# Altium PCB design1.PcbDoc
Units mm, origin at the board's own origin, x right, y up, seen from the top; angles counter-clockwise.
Board outline 144.12 x 156.82 mm, 2 copper layers (Top, Bottom); 84 components, 55 nets, 253 pads, 25 vias.
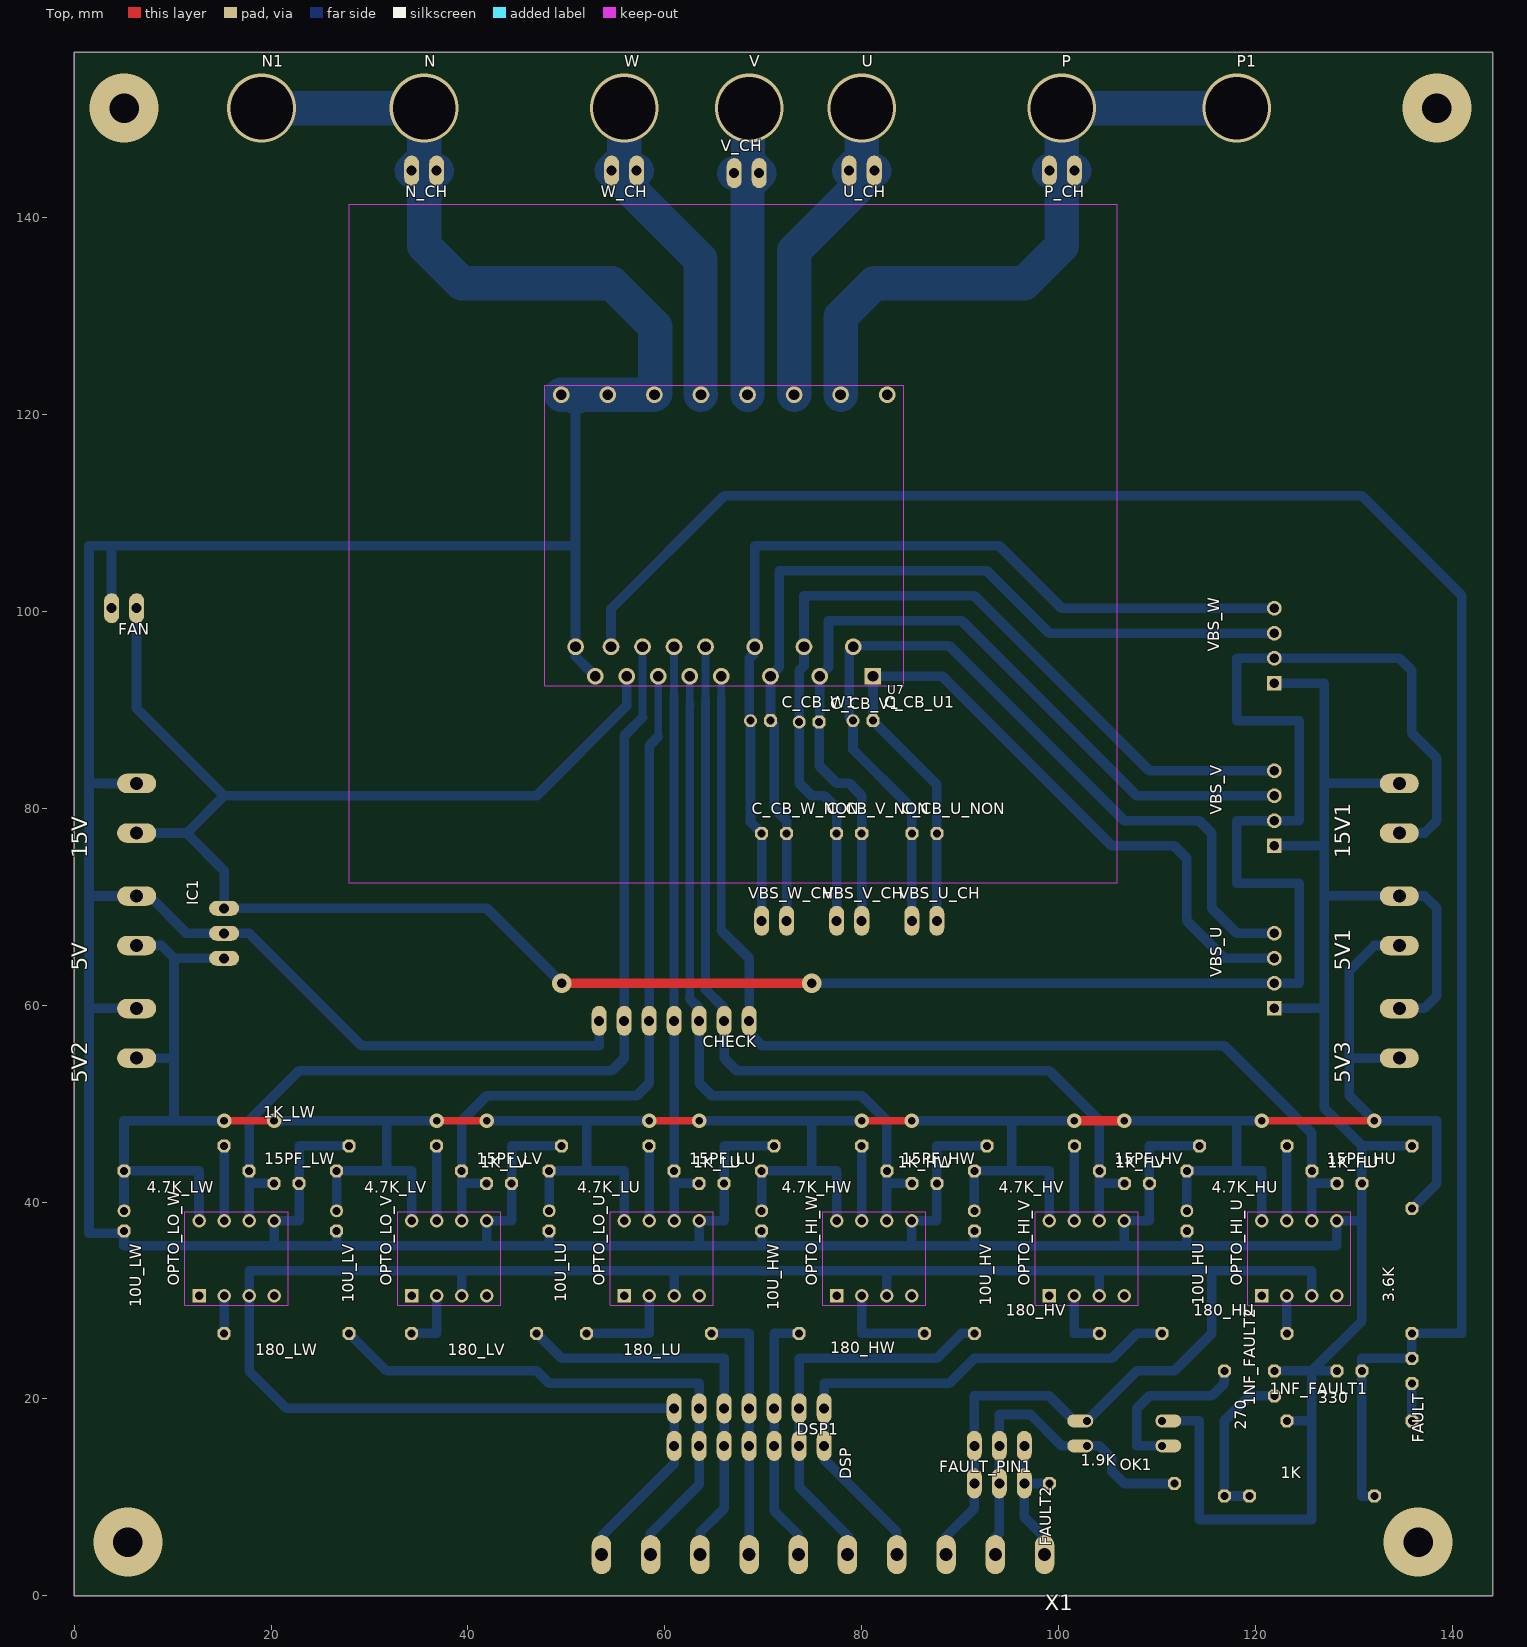
[diagram p0: Top view]
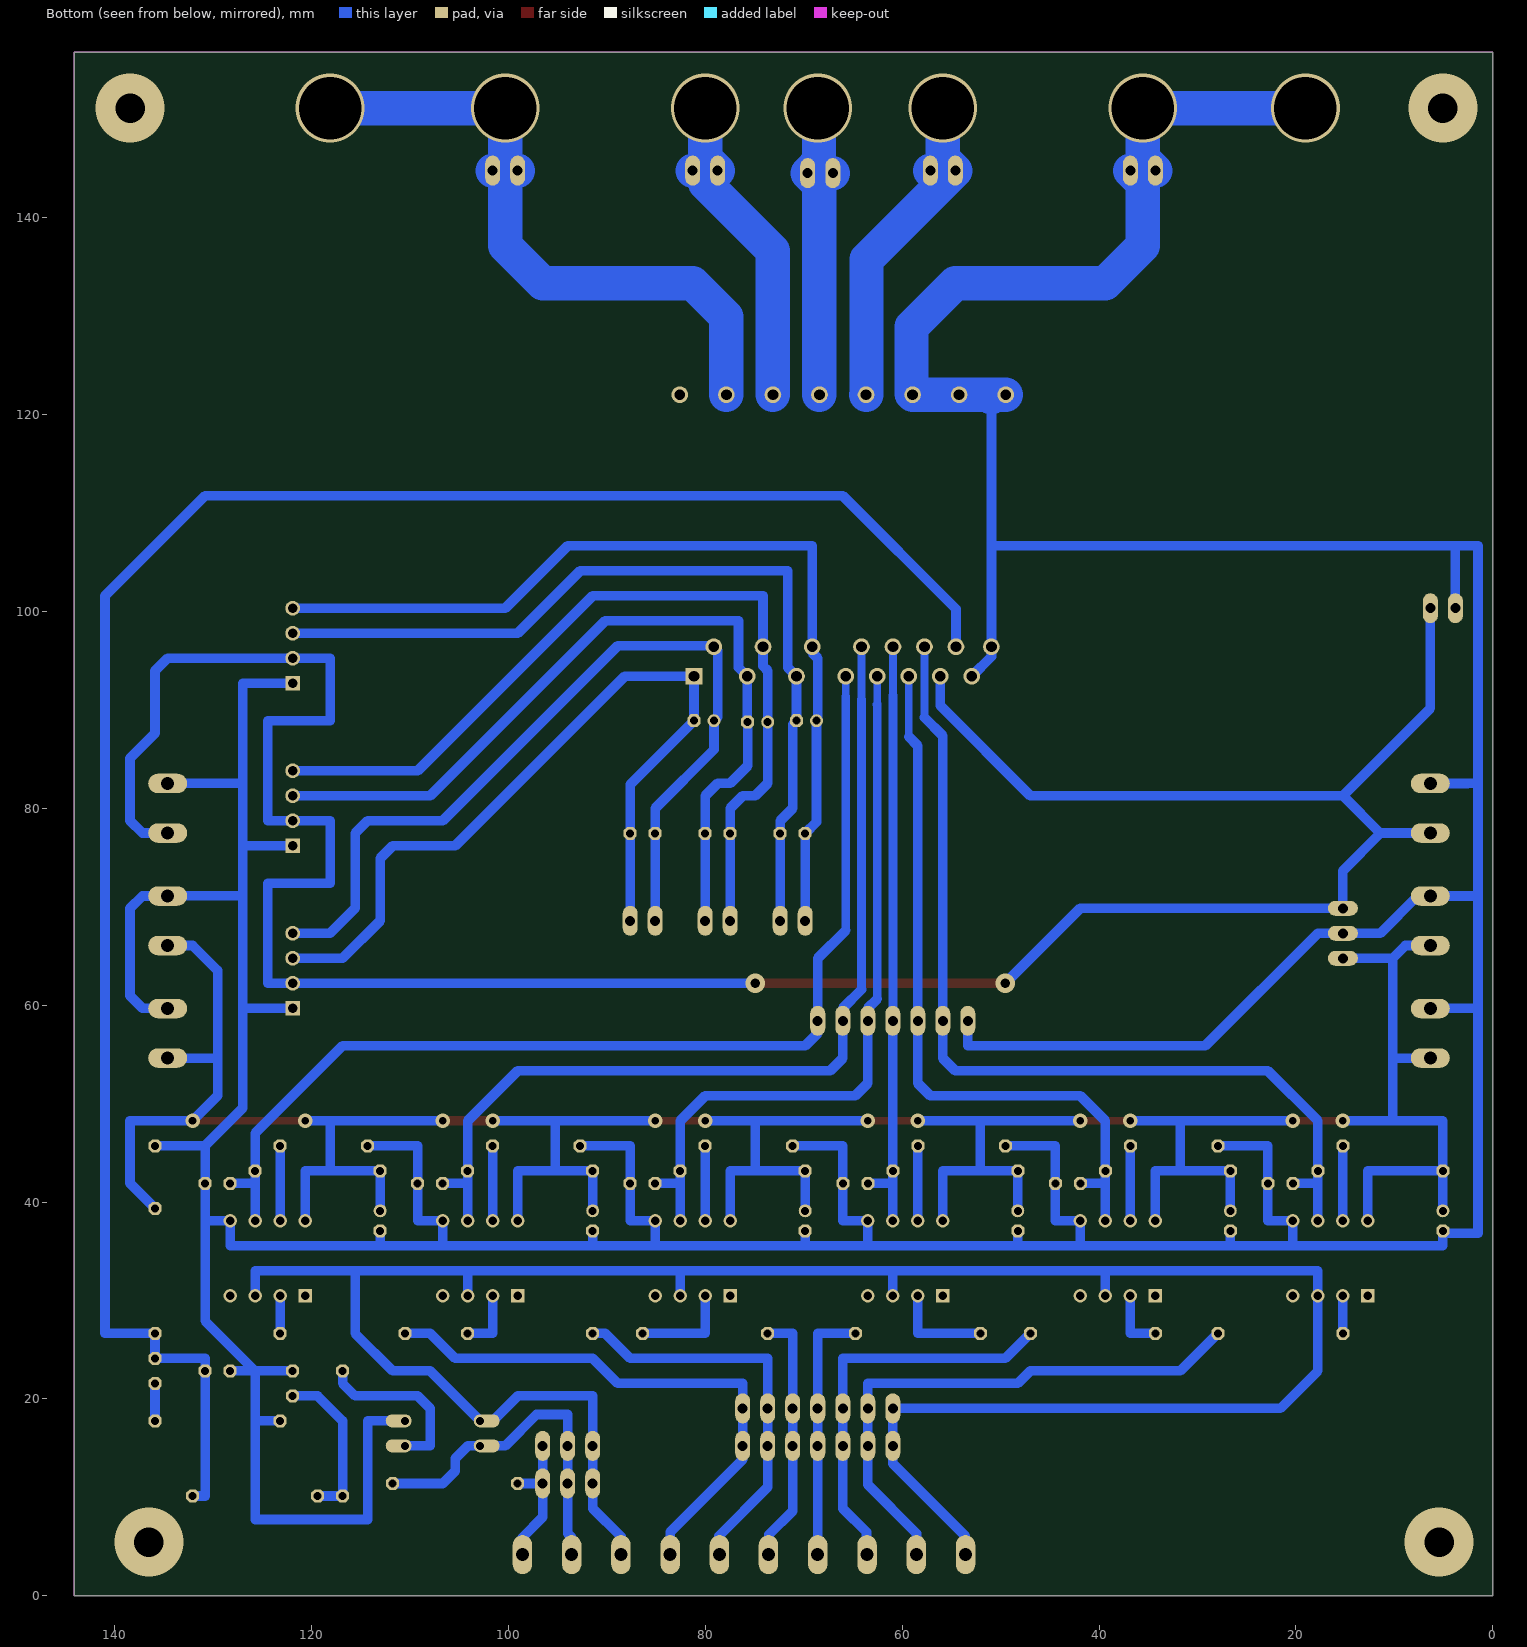
[diagram p1: Bottom view, seen from below]

## Layer stack, top to bottom
Top Solder: solder mask 0.0102, Solder Resist, Dk 3.5
Top: signal copper 0.035
Dielectric 1: dielectric 0.32, FR-4, Dk 4.8
Bottom: signal copper 0.035
Bottom Solder: solder mask 0.0102, Solder Resist, Dk 3.5

## Board outline
0,156.82 0,0 144.12,0 144.12,156.82

## Design rules (kind name [scope] priority, off if disabled: settings)
BoardOutlineClearance mdCopperDimension [All] p1: gap=0.254 ignorepadtopadclearanceinfootprint=FALSE except(0: Arc-SplitContinuation Track-SplitContinuation SMDPad-SplitContinuation THPad-SplitContinuation Via-SplitContinuation Fill-SplitContinuation Poly-SplitContinuation Region-SplitContinuation Text-SplitContinuation; 1.016: Poly-OutlineEdge Poly-CavityEdge Poly-CutoutEdge Poly-SplitBarrior)
Clearance "Clearance (Same Net)" [All] p1: gap=0.152 ignorepadtopadclearanceinfootprint=FALSE
Clearance [All] p2: gap=0.152 ignorepadtopadclearanceinfootprint=FALSE
HoleSize [All] p1: absolutevalues=TRUE maxlimit=2540 minlimit=0.35 maxpercent=80.000 minpercent=20.000
HoleToHoleClearance mdDrill [All] p1: gap=0.152 allowstackedmicrovias=TRUE
MinimumSolderMaskSliver [All] p1 off: minsoldermaskwidth=0.254
PasteMaskExpansion mlMinCreamFrame [All] p1: expansion=0
PolygonConnect ThermalVias [IsVia] p1: connectstyle=Direct reliefconductorwidth=0.254 reliefentries=4 polygonreliefangle="90 Angle" airgapwidth=0.254
PolygonConnect [All] p2: connectstyle=Relief reliefconductorwidth=0.254 reliefentries=4 polygonreliefangle="90 Angle" airgapwidth=0.254
RoutingVias [All] p1: holewidth=0.35 width=0.756 viastyle="Through Hole" minholewidth=0.35 minwidth=0.756 maxholewidth=2.54 maxwidth=2.54
SolderMaskExpansion mlMinStopFrame [All] p1: expansion=0.102 istentingtop=FALSE
Width [All] p1: maxlimit=0.254 minlimit=0.152 preferedwidth=0.152
26 further rules are at their usual default settings.

## Components (designator, comment, footprint, x,y, rotation, side; value= is the part's Value field where it differs from the comment)
1.9K "" 0207/12 105.41,11.43 r0 top
1K "" 0207/12 125.73,10.16 r0 top
1K_HU "" 0207/12 129.54,45.72 r180 top
1K_HV "" 0207/12 107.95,45.72 r180 top
1K_HW "" 0207/12 86.36,45.72 r180 top
1K_LU "" 0207/12 64.77,45.72 r180 top
1K_LV "" 0207/12 43.18,45.72 r180 top
1K_LW "" 0207/12 21.59,45.72 r180 top
1NF_FAULT1 "" C025-025X050 129.54,22.86 r180 top
1NF_FAULT2 "" C025-025X050 121.92,21.59 r90 top
3.6K "" 0207/12 135.89,33.02 r90 top
4.7K_HU "" 0207/12 119.38,43.18 r180 top
4.7K_HV "" 0207/12 97.79,43.18 r180 top
4.7K_HW "" 0207/12 76.2,43.18 r180 top
4.7K_LU "" 0207/12 54.61,43.18 r180 top
4.7K_LV "" 0207/12 33.02,43.18 r180 top
4.7K_LW "" 0207/12 11.43,43.18 r180 top
5V "" AK500/2 6.35,68.58 r90 top
5V1 "" AK500/2 134.62,68.58 r90 top
5V2 "" AK500/2 6.35,57.15 r90 top
5V3 "" AK500/2 134.62,57.15 r90 top
10U_HU "" E2-4 113.03,38.1 r270 top
10U_HV "" E2-4 91.44,38.1 r270 top
10U_HW "" E2-4 69.85,38.1 r270 top
10U_LU "" E2-4 48.26,38.1 r270 top
10U_LV "" E2-4 26.67,38.1 r270 top
10U_LW "" E2-4 5.08,38.1 r270 top
15PF_HU "" C025-025X050 129.54,41.91 r0 top
15PF_HV "" C025-025X050 107.95,41.91 r0 top
15PF_HW "" C025-025X050 86.36,41.91 r0 top
15PF_LU "" C025-025X050 64.77,41.91 r0 top
15PF_LV "" C025-025X050 43.18,41.91 r0 top
15PF_LW "" C025-025X050 21.59,41.91 r0 top
15V "" AK500/2 6.35,80.01 r90 top
15V1 "" AK500/2 134.62,80.01 r90 top
180_HU "" 0207/12 116.84,26.67 r0 top
180_HV "" 0207/12 97.79,26.67 r0 top
180_HW "" 0207/12 80.01,26.67 r0 top
180_LU "" 0207/12 58.42,26.67 r180 top
180_LV "" 0207/12 40.64,26.67 r180 top
180_LW "" 0207/12 21.59,26.67 r180 top
270 "" 0207/12 116.84,16.51 r270 top
330 "" 0207/12 129.54,17.78 r0 top
C_CB_U1 "" E2-4 80.137,88.9 r0 top
C_CB_U_NON "" C025-025X050 86.36,77.47 r0 top
C_CB_V1 "" E2-4 74.676,88.773 r0 top
C_CB_V_NON "" C025-025X050 78.74,77.47 r0 top
C_CB_W1 "" E2-4 69.723,88.9 r0 top
C_CB_W_NON "" C025-025X050 71.12,77.47 r0 top
CHECK "" 1X07 60.96,58.42 r180 top
DSP "" 1X07/90 68.58,11.43 r180 top
DSP1 "" 1X07 68.58,19.05 r180 top
FAN "" 1X02 5.08,100.33 r180 top
FAULT "" LED3MM 135.89,22.86 r270 top
FAULT2 "" 1X03/90 93.98,7.62 r180 top
FAULT_PIN1 "" 1X03 93.98,15.24 r180 top
IC1 "" 78XXS 17.78,67.31 r270 top
N "" PAD_0.2500 35.56,151.13 r0 top
N1 "" PAD_0.2500 19.05,151.13 r0 top
N_CH "" 1X02 35.56,144.78 r180 top
OK1 "LTV816" DIL04 106.68,16.51 r90 top
OPTO_HI_U "" DIP762W50P254L977H451Q8 124.46,34.29 r90 top
OPTO_HI_V "" DIP762W50P254L977H451Q8 102.87,34.29 r90 top
OPTO_HI_W "" DIP762W50P254L977H451Q8 81.28,34.29 r90 top
OPTO_LO_U "" DIP762W50P254L977H451Q8 59.69,34.29 r90 top
OPTO_LO_V "" DIP762W50P254L977H451Q8 38.1,34.29 r90 top
OPTO_LO_W "" DIP762W50P254L977H451Q8 16.51,34.29 r90 top
P "" PAD_0.2500 100.33,151.13 r0 top
P1 "" PAD_0.2500 118.11,151.13 r0 top
P_CH "" 1X02 100.33,144.78 r180 top
U "" PAD_0.2500 80.01,151.13 r0 top
U7 "" INFINEON_IKCM30F60GDXKMA1_0 66.04,109.22 r180 top
U_CH "" 1X02 80.01,144.78 r180 top
V "" PAD_0.2500 68.58,151.13 r0 top
V_CH "" 1X02 68.326,144.526 r0 top
VBS_U "" PDSE1S5S15S 121.92,59.69 r90 top
VBS_U_CH "" 1X02 86.36,68.58 r0 top
VBS_V "" PDSE1S5S15S 121.92,76.2 r90 top
VBS_V_CH "" 1X02 78.74,68.58 r0 top
VBS_W "" PDSE1S5S15S 121.92,92.71 r90 top
VBS_W_CH "" 1X02 71.12,68.58 r0 top
W "" PAD_0.2500 55.88,151.13 r0 top
W_CH "" 1X02 55.88,144.78 r180 top
X1 "" AK500/10 76.073,4.191 r180 top

## Footprints (in the part's own frame and the unit in brackets; to place one, negate y for a bottom-side part, rotate by r counter-clockwise, add the part's x,y. Pads: shape width x height; smd on the part's side, far side on the other; paste and mask are expansions set on the pad)
1X02 [mil] "1X02"
  oval 60x120 hole 40: 1(-50,0) 2(50,0)
  body extent -80,-60 80,60, height 150
1X03 [mil] "1X03"
  oval 60x120 hole 40: 1(-100,0) 2(0,0) 3(100,0)
  body extent -130,-60 130,60, height 150
1X03/90 [mil] "1X03/90"
  oval 60x120 hole 40: 1(-100,-150) 2(0,-150) 3(100,-150)
  body extent -130,-210 130,-90, height 50
1X07 [mil] "1X07"
  oval 60x120 hole 40: 1(-300,0) 2(-200,0) 3(-100,0) 4(0,0) 5(100,0) 6(200,0) 7(300,0)
  body extent -330,-60 330,60, height 150
1X07/90 [mil] "1X07/90"
  oval 60x120 hole 40: 1(-300,-150) 2(-200,-150) 3(-100,-150) 4(0,-150) 5(100,-150) 6(200,-150) 7(300,-150)
  body extent -330,-210 330,-90, height 50
78XXS [mil] "78XXS"
  oval 60x120 hole 40: GND(0,-100) IN(-100,-100) OUT(100,-100)
  body extent -135,-160 135,-30, height 150
0207/12 [mil] "0207/12"
  oct 52x52 / inner round 48.04 / far side oct 52x52 hole 32: 1(-250,0) 2(250,0)
  body extent -274,-24 274,24, height 150
AK500/2 [mil] "AK500/2"
  oval 78x156 hole 52: 1(-99,0) 2(99,0)
  body extent -172,-78 172,78, height 150
AK500/10 [mil] "AK500/10"
  oval 78x156 hole 52: 1(-886,0) 2(-689,0) 3(-492,0) 4(-295,0) 5(-98,0) 6(98,0) 7(295,0) 8(492,0) 9(689,0) 10(886,0)
  body extent -959,-78 959,78, height 150
C025-025X050 [mil] "C025-025X050"
  oct 52x52 / inner round 48.04 / far side oct 52x52 hole 32: 1(-50,0) 2(50,0)
  body extent -74,-24 74,24, height 150
DIL04 [mil] "DIL04"
  oval 52x104 hole 32 copper offset 0,-26: 1(-50,-150) 2(50,-150)
  oval 52x104 hole 32 copper offset 0,26: 3(50,150) 4(-50,150)
  body extent -76,-228 76,228, height 50
DIP762W50P254L977H451Q8 [mm] "DIP762W50P254L977H451Q8"
  rect 1.358x1.358 / inner round 1.255 / far side rect 1.358x1.358 hole 0.85: 1(-3.81,3.81)
  round 1.358 hole 0.85: 2(-3.81,1.27) 3(-3.81,-1.27) 4(-3.81,-3.81) 5(3.81,-3.81) 6(3.81,-1.27) 7(3.81,1.27) 8(3.81,3.81)
  Top keep-out lines w0.05: -4.75,5.25 -4.75,-5.25 4.75,-5.25 4.75,5.25 -4.75,5.25
  body extent -4.78,-5.28 4.78,5.28, height 3.81
E2-4 [mil] "E2-4"
  round 52 hole 32: +(-40,0)
  oct 52x52 / inner round 48.04 / far side oct 52x52 hole 32: -(40,0)
  body extent -66,-43 64,43, height 150
INFINEON_IKCM30F60GDXKMA1_0 [mm] "INFINEON_IKCM30F60GDXKMA1_0"
  rect 1.7x1.7 / inner round 1.571 / far side rect 1.7x1.7 hole 1.1: 1(-15.1,15.8)
  round 1.7 hole 1.1: 2(-13.1,12.8) 3(-9.7,15.8) 4(-8.1,12.8) 5(-4.7,15.8) 6(-3.1,12.8) 7(0.3,15.8) 8(1.9,12.8) 9(3.5,15.8) 10(5.1,12.8) 11(6.7,15.8) 12(8.3,12.8) 13(9.9,15.8) 14(11.5,12.8) 15(13.1,15.8) 16(15.1,12.8) 17(16.555,-12.8) 18(11.825,-12.8) 19(7.095,-12.8) 20(2.365,-12.8) 21(-2.365,-12.8) 22(-7.095,-12.8) 23(-11.825,-12.8) 24(-16.555,-12.8)
  Top keep-out lines w0.1: 18.25,16.75 18.25,-13.75 -18.25,-13.75 -18.25,16.75 18.25,16.75
  body extent -18.3,-13.8 18.3,16.8, height 3.81
LED3MM [mil] "LED3MM"
  oct 52x52 / inner round 48.04 / far side oct 52x52 hole 32: A(-50,0) K(50,0)
  body extent -85,-55 74,55, height 150
PAD_0.2500 [mm] "PAD_0.2500"
  round 6.35 hole 6.35: 1(0,0)
  body extent -3.18,-3.18 3.18,3.18, height 1.27
PDSE1S5S15S [mm] "PDSE1S5S15S"
  rect 1.508x1.508 / inner round 1.393 / far side rect 1.508x1.508 hole 1: 1(0,0)
  round 1.508 hole 1: 2(2.54,0) 3(5.08,0) 4(7.62,0)
  body extent -3.05,-1.95 10.66,6.15, height 3.81

## Part data
1.9K 1K 1K_HU 1K_HV 1K_HW 1K_LU 1K_LV 1K_LW 3.6K 4.7K_HU 4.7K_HV 4.7K_HW 4.7K_LU 4.7K_LV 4.7K_LW 180_HU 180_HV 180_HW 180_LU 180_LV 180_LW 270 330: library part 0207/12, PackageName=0207/12
1NF_FAULT1 1NF_FAULT2 15PF_HU 15PF_HV 15PF_HW 15PF_LU 15PF_LV 15PF_LW C_CB_U_NON C_CB_V_NON C_CB_W_NON: library part C025-025X050, PackageName=C025-025X050
5V 5V1 5V2 5V3 15V 15V1: library part AK500/2, PackageName=AK500/2
10U_HU 10U_HV 10U_HW 10U_LU 10U_LV 10U_LW C_CB_U1 C_CB_V1 C_CB_W1: library part E2-4, PackageName=E2-4
CHECK DSP1: library part 1X07, PackageName=1X07
DSP: library part 1X07/90, PackageName=1X07/90
FAN N_CH P_CH U_CH V_CH VBS_U_CH VBS_V_CH VBS_W_CH W_CH: library part 1X02, PackageName=1X02
FAULT: library part LED3MM, PackageName=LED3MM
FAULT2: library part 1X03/90, PackageName=1X03/90
FAULT_PIN1: library part 1X03, PackageName=1X03
IC1: library part 78XXS, PackageName=78XXS
N N1 P P1 U V W: library part PAD_0.2500, PackageName=PAD_0.2500
OK1: library part DIL04, PackageName=DIL04
OPTO_HI_U OPTO_HI_V OPTO_HI_W OPTO_LO_U OPTO_LO_V OPTO_LO_W: library part DIP762W50P254L977H451Q8, PackageName=DIP762W50P254L977H451Q8
U7: library part INFINEON_IKCM30F60GDXKMA1_0, PackageName=INFINEON_IKCM30F60GDXKMA1_0
VBS_U VBS_V VBS_W: library part PDSE1S5S15S, PackageName=PDSE1S5S15S
X1: library part AK500/10, PackageName=AK500/10

## Via types
v1: diameter 1.5/1.5 (per signal layer), hole 0.8, Top to Bottom, 12 vias
v2: diameter 7/7 (per signal layer), hole 3, Top to Bottom, 11 vias
v3: diameter 2/2 (per signal layer), hole 1, Top to Bottom, 2 vias

## Nets (pads, with @x,y where several pads share a name; then routed paths per layer and width w, separated by ;. In a path a pad name is that pad's centre, name@x,y a point inside that pad or via, vN(x,y) a via of type N, cw(c..) or ccw(c..) an arc to the next point about the centre after c; other vN are vias at no path point)
5V: 3.6K.2 4.7K_HU.2 4.7K_HV.2 4.7K_HW.2 4.7K_LU.2 4.7K_LV.2 4.7K_LW.2 5V1.1 5V2.1 5V3.1 5V.1 10U_HU.+ 10U_HV.+ 10U_HW.+ 10U_LU.+ 10U_LV.+ 10U_LW.+ IC1.OUT OPTO_HI_U.8 OPTO_HI_V.8 OPTO_HI_W.8 OPTO_LO_U.8 OPTO_LO_V.8 OPTO_LO_W.8 | length 349.5
  Top w0.8: v1(15.24,48.26) v1(20.32,48.26) ; v1(36.83,48.26) v1(41.91,48.26) ; v1(58.42,48.26) v1(63.5,48.26) ; v1(80.01,48.26) v1(85.09,48.26) ; v1(120.65,48.26) v1(132.08,48.26)
  Top w1: v1(101.6,48.26) v1(106.68,48.26)
  Bottom w1: 10U_LW.+ 4.7K_LW.2 ; 5V2.1 6.375,54.61 10.16,54.61 ; 5V.1 8.89,66.065 10.16,64.795 ; OPTO_LO_W.8 12.7,43.18 4.7K_LW.2 ; v1(15.24,48.26) 10.16,48.26 ; IC1.OUT 10.185,64.77 10.16,64.795 ; v1(20.32,48.26) 31.75,48.26 ; 10U_LV.+ 4.7K_LV.2 ; OPTO_LO_V.8 34.29,43.18 4.7K_LV.2 ; v1(36.83,48.26) 31.75,48.26 ; v1(41.91,48.26) 52.07,48.26 ; 10U_LU.+ 4.7K_LU.2 ; OPTO_LO_U.8 55.88,43.18 4.7K_LU.2 ; v1(58.42,48.26) 52.07,48.26 ; v1(63.5,48.26) 74.93,48.26 ; 10U_HW.+ 4.7K_HW.2 ; OPTO_HI_W.8 77.47,43.18 4.7K_HW.2 ; v1(80.01,48.26) 74.93,48.26 ; v1(85.09,48.26) 95.25,48.26 ; 10U_HV.+ 4.7K_HV.2 ; OPTO_HI_V.8 99.06,43.18 4.7K_HV.2 ; v1(101.6,48.26) 95.25,48.26 ; v1(106.68,48.26) 118.11,48.26 ; 10U_HU.+ 4.7K_HU.2 118.11,43.18 ; OPTO_HI_U.8 120.65,43.18 118.11,43.18 ; v1(120.65,48.26) 118.11,48.26 ; 5V3.1 134.595,54.61 129.54,54.61 ; 5V1.1 132.08,66.065 129.54,63.525 129.54,54.61 ; 3.6K.2 138.43,41.91 138.43,48.26 v1(132.08,48.26) 129.54,50.8 129.54,54.61 ; 4.7K_LW.2 5.08,48.26 10.16,48.26 ; 10.16,48.26 10.16,54.61 ; 10.16,54.61 10.16,64.795 ; 4.7K_LV.2 31.75,43.18 31.75,48.26 ; 4.7K_LU.2 52.07,43.18 52.07,48.26 ; 4.7K_HW.2 74.93,43.18 74.93,48.26 ; 4.7K_HV.2 95.25,43.18 95.25,48.26 ; 118.11,43.18 118.11,48.26
15V: 15V1.1 15V.1 FAN.1 IC1.IN U7.13 VBS_U.2 VBS_V.2 VBS_W.2 | length 298.5
  Top w1: v3(49.53,62.23) v3(74.93,62.23)
  Bottom w1: FAN.1 6.35,90.17 15.24,81.28 ; v3(49.53,62.23) 41.91,69.85 IC1.IN 15.24,73.66 11.405,77.495 15V.1 11.455,77.495 15.24,81.28 ; U7.13 56.14,90.43 46.99,81.28 15.24,81.28 ; v3(74.93,62.23) VBS_U.2 124.46,62.23 124.46,72.39 118.11,72.39 118.11,78.74 VBS_V.2 124.46,78.74 124.46,88.9 118.11,88.9 118.11,95.25 VBS_W.2 134.62,95.25 135.89,93.98 135.89,87.63 138.43,85.09 138.43,78.74 137.185,77.495 15V1.1
DSP_5V: 1.9K.1 FAULT2.1 FAULT_PIN1.1 X1.1 | length 14.4
  Bottom w1: FAULT_PIN1.1 FAULT2.1 ; X1.1 98.577,5.944 96.52,8.001 FAULT2.1 ; 1.9K.1 FAULT2.1
DSP_GND: DSP1.7 DSP.7 FAULT2.3 FAULT_PIN1.3 OK1.3 OPTO_HI_U.3 OPTO_HI_V.3 OPTO_HI_W.3 OPTO_LO_U.3 OPTO_LO_V.3 OPTO_LO_W.3 X1.3 X1.10 | length 247.3
  Bottom w1: OPTO_LO_V.3 39.37,33.02 ; X1.10 53.594,4.216 53.594,6.096 60.96,13.462 DSP.7 ; DSP.7@60.96,13.97 DSP.7 ; OPTO_LO_U.3 60.96,33.02 ; OPTO_HI_W.3 82.55,33.02 ; X1.3 88.57,6.02 91.44,8.89 FAULT2.3 FAULT_PIN1.3 91.44,20.32 99.06,20.32 101.6,17.78 OK1.3 107.95,22.86 111.76,22.86 115.57,26.67 115.57,33.02 ; OPTO_HI_V.3 104.14,33.02 ; OPTO_HI_U.3 125.73,33.02 115.57,33.02 ; 39.37,33.02 60.96,33.02 ; 39.37,33.02 17.78,33.02 OPTO_LO_W.3 17.78,22.86 21.59,19.05 DSP1.7 DSP.7 ; 60.96,33.02 82.55,33.02 ; 82.55,33.02 104.14,33.02 ; 104.14,33.02 115.57,33.02
FAULT: 1.9K.2 FAULT2.2 FAULT_PIN1.2 OK1.4 X1.2 | length 35.8
  Bottom w1: X1.2 93.574,5.944 93.98,6.35 FAULT2.2 FAULT_PIN1.2 93.98,18.415 97.155,18.415 100.33,15.24 OK1.4 104.14,15.24 105.41,13.97 105.41,12.7 106.68,11.43 1.9K.2
GND: 1K_HU.1 1K_HV.1 1K_HW.1 1K_LU.1 1K_LV.1 1K_LW.1 1NF_FAULT1.2 1NF_FAULT2.2 5V1.2 5V2.2 5V3.2 5V.2 10U_HU.- 10U_HV.- 10U_HW.- 10U_LU.- 10U_LV.- 10U_LW.- 15PF_HU.2 15PF_HV.2 15PF_HW.2 15PF_LU.2 15PF_LV.2 15PF_LW.2 15V1.2 15V.2 330.1 CHECK.7 FAN.2 IC1.GND N1.1 N.1 N_CH.1 N_CH.2 OK1.2 OPTO_HI_U.5 OPTO_HI_V.5 OPTO_HI_W.5 OPTO_LO_U.5 OPTO_LO_V.5 OPTO_LO_W.5 U7.15 U7.16 U7.17 U7.18 U7.19 VBS_U.1 VBS_V.1 VBS_W.1 | length 713.6
  Bottom w1: 1.516,70.874 1.516,59.69 ; 2.54,82.525 15V.2 6.325,82.55 1.516,82.55 ; FAN.2 3.81,106.68 ; 5V2.2 6.325,59.69 1.516,59.69 ; 10U_LV.- 26.67,35.56 ; 1K_LW.1 22.86,45.72 15PF_LW.2 22.86,38.1 OPTO_LO_W.5 20.32,35.56 ; 10U_LU.- 48.26,35.56 ; 1K_LV.1 44.45,45.72 15PF_LV.2 44.45,38.1 OPTO_LO_V.5 41.91,35.56 ; 50.94,121.78 50.94,106.68 ; U7.15 50.94,95.42 U7.16 50.94,106.68 ; CHECK.7 53.34,55.88 29.21,55.88 17.78,67.31 IC1.GND 11.43,67.31 7.645,71.095 5V.2 1.516,71.095 1.516,82.55 ; 10U_HW.- 69.85,35.56 ; 1K_LU.1 66.04,45.72 15PF_LU.2 66.04,38.1 OPTO_LO_U.5 63.5,35.56 ; 10U_HV.- 91.44,35.56 ; 1K_HW.1 87.63,45.72 15PF_HW.2 87.63,38.1 OPTO_HI_W.5 85.09,35.56 ; OK1.2 114.3,17.78 114.3,7.766 125.73,7.766 125.73,17.78 ; 10U_HU.- 113.03,35.56 ; 1K_HV.1 109.22,45.72 15PF_HV.2 109.22,38.1 OPTO_HI_V.5 106.68,35.56 ; 1NF_FAULT2.2 125.73,22.86 ; VBS_U.1 127,59.69 ; VBS_V.1 127,76.2 ; VBS_W.1 127,92.71 127,82.55 ; 330.1 125.73,17.78 ; 1NF_FAULT1.2 125.73,22.86 ; 5V3.2 134.645,59.69 137.16,59.69 138.43,60.96 138.43,69.85 137.185,71.095 5V1.2 134.595,71.12 127,71.12 ; 15V1.2 134.595,82.55 127,82.55 ; 1K_HU.1 130.81,45.72 ; 1.516,59.69 1.516,36.83 4.826,36.83 10U_LW.- 5.08,35.56 20.32,35.56 ; 1.516,82.55 1.516,106.68 3.81,106.68 ; 3.81,106.68 50.94,106.68 ; 20.32,35.56 26.67,35.56 ; 26.67,35.56 41.91,35.56 ; 41.91,35.56 48.26,35.56 ; 48.26,35.56 63.5,35.56 ; 63.5,35.56 69.85,35.56 ; 69.85,35.56 85.09,35.56 ; 85.09,35.56 91.44,35.56 ; 91.44,35.56 106.68,35.56 ; 106.68,35.56 113.03,35.56 ; 113.03,35.56 128.27,35.56 OPTO_HI_U.5 130.81,38.1 ; 125.73,17.78 125.73,22.86 ; 125.73,22.86 130.81,27.94 130.81,38.1 ; 127,59.69 127,71.12 ; 127,59.69 127,49.53 130.81,45.72 ; 127,71.12 127,76.2 ; 127,76.2 127,82.55 ; 130.81,38.1 15PF_HU.2 130.81,45.72
  Bottom w3.5: N1.1 N.1 35.56,146.05 N_CH.2 N_CH.1 35.56,143.51 35.56,137.16 39.37,133.35 54.61,133.35 59.055,128.905 59.055,122.13 U7.19 U7.18 U7.17 50.7,122.02 50.94,121.78
HI_U: 4.7K_HU.1 15PF_HU.1 CHECK.1 OPTO_HI_U.6 U7.7 | length 110.3
  Bottom w0.8: U7.7 65.74,91.359 65.786,91.313
  Bottom w0.9: 65.74,67.61 65.74,91.359
  Bottom w1: 65.74,67.61 68.58,64.77 CHECK.1 68.58,57.15 69.85,55.88 116.84,55.88 125.73,46.99 4.7K_HU.1 125.73,41.91 ; OPTO_HI_U.6 125.73,41.91 ; 15PF_HU.1 125.73,41.91
HI_V: 4.7K_HV.1 15PF_HV.1 CHECK.2 OPTO_HI_V.6 U7.8 | length 96
  Bottom w0.8: 64.135,91.059 64.14,91.064 U7.8
  Bottom w0.9: 64.14,61.59 64.14,91.064
  Bottom w1: 64.14,61.59 66.04,59.69 CHECK.2 66.04,54.61 67.31,53.34 99.06,53.34 104.14,48.26 4.7K_HV.1 104.14,41.91 ; OPTO_HI_V.6 104.14,41.91 ; 15PF_HV.1 104.14,41.91
HI_W: 4.7K_HW.1 15PF_HW.1 CHECK.3 OPTO_HI_W.6 U7.9 | length 75.2
  Bottom w0.8: U7.9 62.54,90.622 62.611,90.551
  Bottom w0.9: 62.54,60.65 62.54,90.622
  Bottom w1: 62.54,60.65 63.5,59.69 CHECK.3 63.5,52.07 64.77,50.8 80.01,50.8 82.55,48.26 4.7K_HW.1 82.55,41.91 ; OPTO_HI_W.6 82.55,41.91 ; 15PF_HW.1 82.55,41.91
LO_U: 4.7K_LU.1 15PF_LU.1 CHECK.4 OPTO_LO_U.6 U7.10 | length 60.9
  Bottom w0.8: U7.10 60.94,91.46 60.96,91.44
  Bottom w0.9: CHECK.4@60.94,58.44 60.94,91.46
  Bottom w1: CHECK.4@60.94,58.44 CHECK.4 4.7K_LU.1 60.96,41.91 ; OPTO_LO_U.6 60.96,41.91 ; 15PF_LU.1 60.96,41.91
LO_V: 4.7K_LV.1 15PF_LV.1 CHECK.5 OPTO_LO_V.6 U7.11 | length 75.1
  Bottom w0.8: 59.34,87.28 U7.11
  Bottom w1: OPTO_LO_V.6 39.37,41.91 ; 15PF_LV.1 39.37,41.91 ; 59.34,87.28 58.42,86.36 CHECK.5 58.42,52.07 57.15,50.8 41.91,50.8 39.37,48.26 4.7K_LV.1 39.37,41.91
LO_W: 4.7K_LW.1 15PF_LW.1 CHECK.6 OPTO_LO_W.6 U7.12 | length 96
  Bottom w0.8: 57.74,89.236 U7.12
  Bottom w1: OPTO_LO_W.6 17.78,41.91 ; 15PF_LW.1 17.78,41.91 ; 57.74,89.236 55.88,87.376 CHECK.6 55.88,54.61 54.61,53.34 22.86,53.34 17.78,48.26 4.7K_LW.1 17.78,41.91
N$1: C_CB_W1.- C_CB_W_NON.2 U7.5 VBS_W.3 VBS_W_CH.2 | length 89.5
  Bottom w1: VBS_W_CH.2 C_CB_W_NON.2 72.39,78.74 71.12,80.01 71.12,88.519 C_CB_W1.- C_CB_W1.- U7.5 71.628,94.308 71.628,104.14 92.71,104.14 99.06,97.79 VBS_W.3
N$2: C_CB_W1.+ C_CB_W_NON.1 U7.6 VBS_W.4 VBS_W_CH.1 | length 94.3
  Bottom w1: VBS_W_CH.1 C_CB_W_NON.1 68.707,78.613 C_CB_W1.+ 68.58,89.027 68.58,95.25 69.14,95.81 U7.6 69.14,106.68 93.98,106.68 100.33,100.33 VBS_W.4
N$3: 1K.2 1NF_FAULT1.1 3.6K.1 FAULT.A U7.14 | length 202.1
  Bottom w1: U7.14 54.54,100.26 66.04,111.76 130.81,111.76 140.97,101.6 140.97,26.67 3.6K.1 FAULT.A 130.81,24.13 1NF_FAULT1.1 130.81,10.16 1K.2
N$4: C_CB_V1.- C_CB_V_NON.2 U7.3 VBS_V.3 VBS_V_CH.2 | length 86.1
  Bottom w1: VBS_V_CH.2 C_CB_V_NON.2 80.01,81.28 78.74,82.55 77.47,82.55 75.692,84.328 C_CB_V1.- 75.74,88.821 U7.3 76.629,94.309 76.629,99.06 90.17,99.06 107.95,81.28 VBS_V.3
N$5: 330.2 FAULT.K | length 3.8
  Bottom w1: 330.2 FAULT.K
N$6: C_CB_V1.+ C_CB_V_NON.1 U7.4 VBS_V.4 VBS_V_CH.1 | length 90.7
  Bottom w1: VBS_V_CH.1 C_CB_V_NON.1 77.47,80.01 76.2,81.28 74.93,81.28 73.66,82.55 C_CB_V1.+ 73.66,93.98 74.14,94.46 U7.4 74.14,101.6 91.44,101.6 109.22,83.82 VBS_V.4
N$7: C_CB_U1.- C_CB_U_NON.2 U7.1 VBS_U.3 VBS_U_CH.2 | length 83.9
  Bottom w1: VBS_U_CH.2 C_CB_U_NON.2 87.63,82.423 C_CB_U1.- 81.153,93.407 U7.1 88.19,93.42 105.41,76.2 111.76,76.2 113.03,74.93 113.03,68.58 116.84,64.77 VBS_U.3
N$8: C_CB_U1.+ C_CB_U_NON.1 U7.2 VBS_U.4 VBS_U_CH.1 | length 90
  Bottom w1: VBS_U_CH.1 C_CB_U_NON.1 85.09,80.01 79.121,85.979 C_CB_U1.+ 78.74,89.281 78.74,96.02 U7.2 79.24,96.52 88.9,96.52 106.68,78.74 114.3,78.74 115.57,77.47 115.57,69.85 118.11,67.31 VBS_U.4
N$9: 1K_HU.2 OPTO_HI_U.7 | length 7.6
  Bottom w1: OPTO_HI_U.7 1K_HU.2
N$10: 270.1 OK1.1 | length 17.6
  Bottom w1: OK1.1 107.95,15.24 107.95,19.05 109.22,20.32 115.57,20.32 116.84,21.59 270.1
N$11: 1K.1 1NF_FAULT2.1 270.2 | length 16.3
  Bottom w1: 1K.1 270.2 116.84,17.78 119.38,20.32 1NF_FAULT2.1
N$12: 
  other v2: 19.05,151.13
N$13: 
  other v2: 35.56,151.13
N$14: 
  other v2: 55.88,151.13
N$15: 
  other v2: 68.58,151.13
N$16: 
  other v2: 80.01,151.13
N$17: 
  other v2: 100.33,151.13
N$18: 
  other v2: 118.11,151.13
N$19: 
  other v2: 5.08,151.13
N$20: 
  other v2: 138.43,151.13
N$21: 1K_HV.2 OPTO_HI_V.7 | length 7.6
  Bottom w1: OPTO_HI_V.7 1K_HV.2
N$22: 
  other v2: 136.525,5.461
N$23: 1K_LW.2 OPTO_LO_W.7 | length 7.6
  Bottom w1: OPTO_LO_W.7 1K_LW.2
N$24: 
  other v2: 5.461,5.461
N$27: 1K_HW.2 OPTO_HI_W.7 | length 7.6
  Bottom w1: OPTO_HI_W.7 1K_HW.2
N$32: 1K_LU.2 OPTO_LO_U.7 | length 7.6
  Bottom w1: OPTO_LO_U.7 1K_LU.2
N$34: 180_LW.2 OPTO_LO_W.2 | length 3.8
  Bottom w1: 180_LW.2 OPTO_LO_W.2
N$35: 180_LV.2 OPTO_LO_V.2 | length 6.3
  Bottom w1: 180_LV.2 36.83,26.67 OPTO_LO_V.2
N$38: 1K_LV.2 OPTO_LO_V.7 | length 7.6
  Bottom w1: OPTO_LO_V.7 1K_LV.2
N$40: 180_LU.2 OPTO_LO_U.2 | length 10.2
  Bottom w1: 180_LU.2 58.42,26.67 OPTO_LO_U.2
N$41: 180_HW.2 OPTO_HI_W.2 | length 10.2
  Bottom w1: OPTO_HI_W.2 80.01,26.67 180_HW.2
N$42: 180_HV.2 OPTO_HI_V.2 | length 6.3
  Bottom w1: OPTO_HI_V.2 101.6,26.67 180_HV.2
N$43: 180_HU.2 OPTO_HI_U.2 | length 3.8
  Bottom w1: 180_HU.2 OPTO_HI_U.2
OUT_U: U7.22 U.1 U_CH.1 U_CH.2 | length 35.5
  Bottom w3.5: U7.22 73.135,136.635 80.01,143.51 U_CH.2 ; U.1 80.01,146.05 U_CH.2 ; U_CH.1 U_CH.2
OUT_V: U7.21 V.1 V_CH.1 V_CH.2 | length 32.7
  Bottom w3.5: V_CH.1 V_CH.2 ; U7.21 68.405,143.335 V_CH.2 ; V.1 68.453,151.003 68.453,145.669 V_CH.2
OUT_W: U7.20 W.1 W_CH.1 W_CH.2 | length 35.9
  Bottom w3.5: W.1 55.88,146.05 W_CH.2 ; W_CH.1 W_CH.2 ; U7.20 63.627,122.068 63.627,135.763 W_CH.2
S_HI_U: 180_HU.1 DSP1.1 DSP.1 X1.4 | length 56.8
  Bottom w1: X1.4 83.566,6.477 76.2,13.843 DSP.1 DSP1.1 76.2,21.59 88.9,21.59 91.44,24.13 105.41,24.13 107.95,26.67 180_HU.1
S_HI_V: 180_HV.1 DSP1.2 DSP.2 X1.5 | length 40.8
  Bottom w1: X1.5 78.613,4.242 78.613,6.096 73.66,11.049 DSP.2 DSP1.2 73.66,24.13 87.63,24.13 90.17,26.67 180_HV.1
S_HI_W: 180_HW.1 DSP1.3 DSP.3 X1.6 | length 26
  Bottom w1: X1.6 73.533,4.242 73.533,6.223 71.12,8.636 DSP.3 DSP1.3 71.12,26.67 180_HW.1
S_LO_U: 180_LU.1 DSP1.4 DSP.4 X1.7 | length 26.3
  Bottom w1: 180_LU.1 68.58,26.67 DSP1.4 DSP.4 X1.7
S_LO_V: 180_LV.1 DSP1.5 DSP.5 X1.8 | length 41.1
  Bottom w1: 180_LV.1 49.53,24.13 66.04,24.13 DSP1.5 DSP.5 66.04,8.89 63.627,6.477 63.627,4.242 X1.8
S_LO_W: 180_LW.1 DSP1.6 DSP.6 X1.9 | length 57.1
  Bottom w1: 180_LW.1 31.75,22.86 46.99,22.86 48.26,21.59 63.5,21.59 DSP1.6 DSP.6 63.5,11.303 58.547,6.35 58.547,4.216 X1.9
V_POWER: P1.1 P.1 P_CH.1 P_CH.2 U7.23 | length 67.7
  Bottom w3.5: U7.23 77.865,129.935 81.28,133.35 96.52,133.35 100.33,137.16 100.33,144.78 ; P_CH.2 100.33,144.78 ; P_CH.1 100.33,144.78 ; P1.1 P.1 100.33,144.78
pads on no net: OPTO_HI_U.1 OPTO_HI_U.4 OPTO_HI_V.1 OPTO_HI_V.4 OPTO_HI_W.1 OPTO_HI_W.4 OPTO_LO_U.1 OPTO_LO_U.4 OPTO_LO_V.1 OPTO_LO_V.4 OPTO_LO_W.1 OPTO_LO_W.4 U7.24

## Keep-outs
Top:
  region: 27.94,72.39 27.94,141.39 105.94,141.39 105.94,72.39
Keep-Out Layer:
  the board outline again, w0

## Silkscreen, mask and mechanical layers (free items; w line width, h text height)
Dimension:
  the board outline again, w0
Unrouted:
  lines w0: 1.516,70.874 6.35,71.095
Document:
  lines w0.152: 69.85,64.77 72.39,64.77 ; 77.47,64.77 80.01,64.77 ; 85.09,64.77 87.63,64.77
  lines w0.8: 15.24,48.26 20.32,48.26 ; 36.83,48.26 41.91,48.26 ; 58.42,48.26 63.5,48.26 ; 80.01,48.26 85.09,48.26 ; 101.6,48.26 106.68,48.26 ; 120.65,48.26 132.08,48.26
  text "-ve" at 16.51,144.399 h3.1
  text "+ve" at 115.57,144.399 h3.1
  text "-ve" at 28.575,143.51 h3.1
  text "W" at 48.26,143.51 h3.1
  text "U" at 73.914,143.256 h3.1
  text "V" at 62.484,143.129 h3.1
  text "+ve" at 91.821,143.129 h3.1
  text "FAN" at 4.044,105.01 h1.55
  text "-" at 3.239,102.603 h1.55
  text "+" at 6.104,102.597 h1.55
  text "B+" at 125.73,99.949 h1.55
  text "S-" at 125.73,97.409 h1.55
  text "15V" at 125.73,94.869 h1.55
  text "GND" at 125.73,92.329 h1.55
  text "10uF" at 83.289,88.444 h1.55
  text "-" at 12.98,84.329 h3.1 r90
  text "B+" at 125.73,83.439 h1.55
  text "-" at 141.25,83.059 h3.1 r90
  text "S-" at 125.73,80.899 h1.55
  text "15V" at 11.878,80.257 h1.55 r90
  text "15V" at 141.418,78.987 h1.55 r90
  text "15V" at 125.73,78.359 h1.55
  text "0.1uF" at 90.089,77.014 h1.55
  text "GND" at 125.73,75.819 h1.55
  text "+" at 12.991,75.327 h3.1 r90
  text "+" at 141.261,75.327 h3.1 r90
  text "7805" at 13.97,74.549 h1.55
  text "-" at 12.98,71.629 h3.1 r90
  text "-" at 141.25,71.629 h3.1 r90
  text "1" at 19.05,69.469 h1.55
  text "5V" at 11.867,68.356 h1.55 r90
  text "5V" at 141.407,68.356 h1.55 r90
  text "2" at 19.05,66.929 h1.55
  text "B+" at 125.73,66.929 h1.55
  text "B" at 69.672,65.64 h1.55
  text "S" at 72.324,65.645 h1.55
  text "B" at 77.292,65.64 h1.55
  text "S" at 79.944,65.645 h1.55
  text "B" at 84.912,65.64 h1.55
  text "S" at 87.564,65.645 h1.55
  text "3" at 19.05,64.389 h1.55
  text "S-" at 125.73,64.389 h1.55
  text "+" at 12.991,63.897 h3.1 r90
  text "+" at 141.261,63.897 h3.1 r90
  text "U" at 86.158,63.63 h1.55
  text "W" at 71.114,63.608 h1.55
  text "V" at 78.464,63.608 h1.55
  text "15V" at 125.73,61.849 h1.55
  text "GND" at 53.721,60.96 h1.55 r90
  text "LO_W" at 56.261,60.96 h1.55 r90
  text "LO_V" at 58.801,60.96 h1.55 r90
  text "LO_U" at 61.341,60.96 h1.55 r90
  text "HI_W" at 63.881,60.96 h1.55 r90
  text "HI_V" at 66.421,60.96 h1.55 r90
  text "HI_U" at 68.961,60.96 h1.55 r90
  text "-" at 12.98,60.199 h3.1 r90
  text "-" at 141.25,60.199 h3.1 r90
  text "GND" at 125.73,59.309 h1.55
  text "5V" at 11.867,56.926 h1.55 r90
  text "5V" at 141.407,56.926 h1.55 r90
  text "CHECK POINTS" at 56.398,52.945 h1.55
  text "+" at 12.991,52.467 h3.1 r90
  text "+" at 141.261,52.467 h3.1 r90
  text "1k" at 21.412,45.251 h1.55
  text "1k" at 43.002,45.251 h1.55
  text "1k" at 64.592,45.251 h1.55
  text "1k" at 86.182,45.251 h1.55
  text "1k" at 107.772,45.251 h1.55
  text "1k" at 129.362,45.251 h1.55
  text "4.7k" at 9.603,42.744 h1.55
  text "4.7k" at 31.193,42.744 h1.55
  text "4.7k" at 52.783,42.744 h1.55
  text "4.7k" at 74.373,42.744 h1.55
  text "4.7k" at 95.963,42.744 h1.55
  text "4.7k" at 117.553,42.744 h1.55
  text "15pF" at 20.297,39.795 h1.55
  text "15pF" at 41.887,39.795 h1.55
  text "15pF" at 63.477,39.795 h1.55
  text "15pF" at 85.067,39.795 h1.55
  text "15pF" at 106.657,39.795 h1.55
  text "15pF" at 128.247,39.795 h1.55
  text "10uF" at 2.517,34.469 h1.55
  text "10uF" at 24.107,34.469 h1.55
  text "10uF" at 45.697,34.469 h1.55
  text "10uF" at 67.287,34.469 h1.55
  text "10uF" at 88.877,34.469 h1.55
  text "10uF" at 110.467,34.469 h1.55
  text "6N139" at 10.744,32.142 h1.55 r90
  text "6N139" at 32.334,32.142 h1.55 r90
  text "6N139" at 53.924,32.142 h1.55 r90
  text "6N139" at 75.514,32.142 h1.55 r90
  text "6N139" at 97.104,32.142 h1.55 r90
  text "6N139" at 118.694,32.142 h1.55 r90
  text "3.6k" at 136.346,31.179 h1.55 r90
  text "180" at 20.703,26.213 h1.55
  text "180" at 39.753,26.213 h1.55
  text "180" at 57.533,26.213 h1.55
  text "180" at 79.123,26.213 h1.55
  text "180" at 96.903,26.213 h1.55
  text "180" at 115.953,26.213 h1.55
  text "1nF" at 128.27,25.019 h1.55
  text "A+" at 137.16,23.749 h1.55
  text "Led" at 138.811,22.098 h1.55
  text "Lo_W" at 63.881,21.59 h1.55 r90
  text "Lo_V" at 66.421,21.59 h1.55 r90
  text "Lo_U" at 68.961,21.59 h1.55 r90
  text "Hi_W" at 71.501,21.59 h1.55 r90
  text "Hi_V" at 74.041,21.59 h1.55 r90
  text "Hi_U" at 76.581,21.59 h1.55 r90
  text "TLP621" at 104.546,19.863 h1.55
  text "330" at 129.902,18.593 h1.55
  text "DSP_GND" at 91.482,18.547 h1.55 r90
  text "DSP_5V" at 96.603,18.058 h1.55 r90
  text "FAULT" at 94.358,17.688 h1.55 r90
  text "1nF" at 120.65,17.399 h1.55
  text "270" at 117.297,15.586 h1.55 r90
  text "GND_DSP" at 58.801,13.97 h1.55 r90
  text "1.9k" at 103.59,10.974 h1.55
  text "1k" at 124.282,9.691 h1.55

## Text inside footprints (layer, text, board x,y; h text height)
5V: tPlace "2" at 3.81,69.215 h1.54 r90; tPlace "1" at 3.81,64.135 h1.54 r90
5V1: tPlace "2" at 132.08,69.215 h1.54 r90; tPlace "1" at 132.08,64.135 h1.54 r90
5V2: tPlace "2" at 3.81,57.785 h1.54 r90; tPlace "1" at 3.81,52.705 h1.54 r90
5V3: tPlace "2" at 132.08,57.785 h1.54 r90; tPlace "1" at 132.08,52.705 h1.54 r90
15V: tPlace "2" at 3.81,80.645 h1.54 r90; tPlace "1" at 3.81,75.565 h1.54 r90
15V1: tPlace "2" at 132.08,80.645 h1.54 r90; tPlace "1" at 132.08,75.565 h1.54 r90
IC1: tDocu "O" at 13.97,65.405 h1.97 r270; tDocu "I" at 13.97,70.485 h1.97 r270; tDocu "-" at 13.97,67.945 h1.97 r270
X1: tPlace "10" at 56.032,1.651 h1.54 r180; tPlace "9" at 60.477,1.651 h1.54 r180; tPlace "8" at 65.303,1.651 h1.54 r180; tPlace "7" at 70.637,1.651 h1.54 r180; tPlace "6" at 75.463,1.651 h1.54 r180; tPlace "5" at 80.391,1.651 h1.54 r180; tPlace "4" at 85.471,1.651 h1.54 r180; tPlace "3" at 90.297,1.651 h1.54 r180; tPlace "2" at 95.631,1.651 h1.54 r180; tPlace "1" at 100.457,1.651 h1.54 r180